# EAGLE board schematic_March15 (EAGLE 9.3.0), part 1 of 2
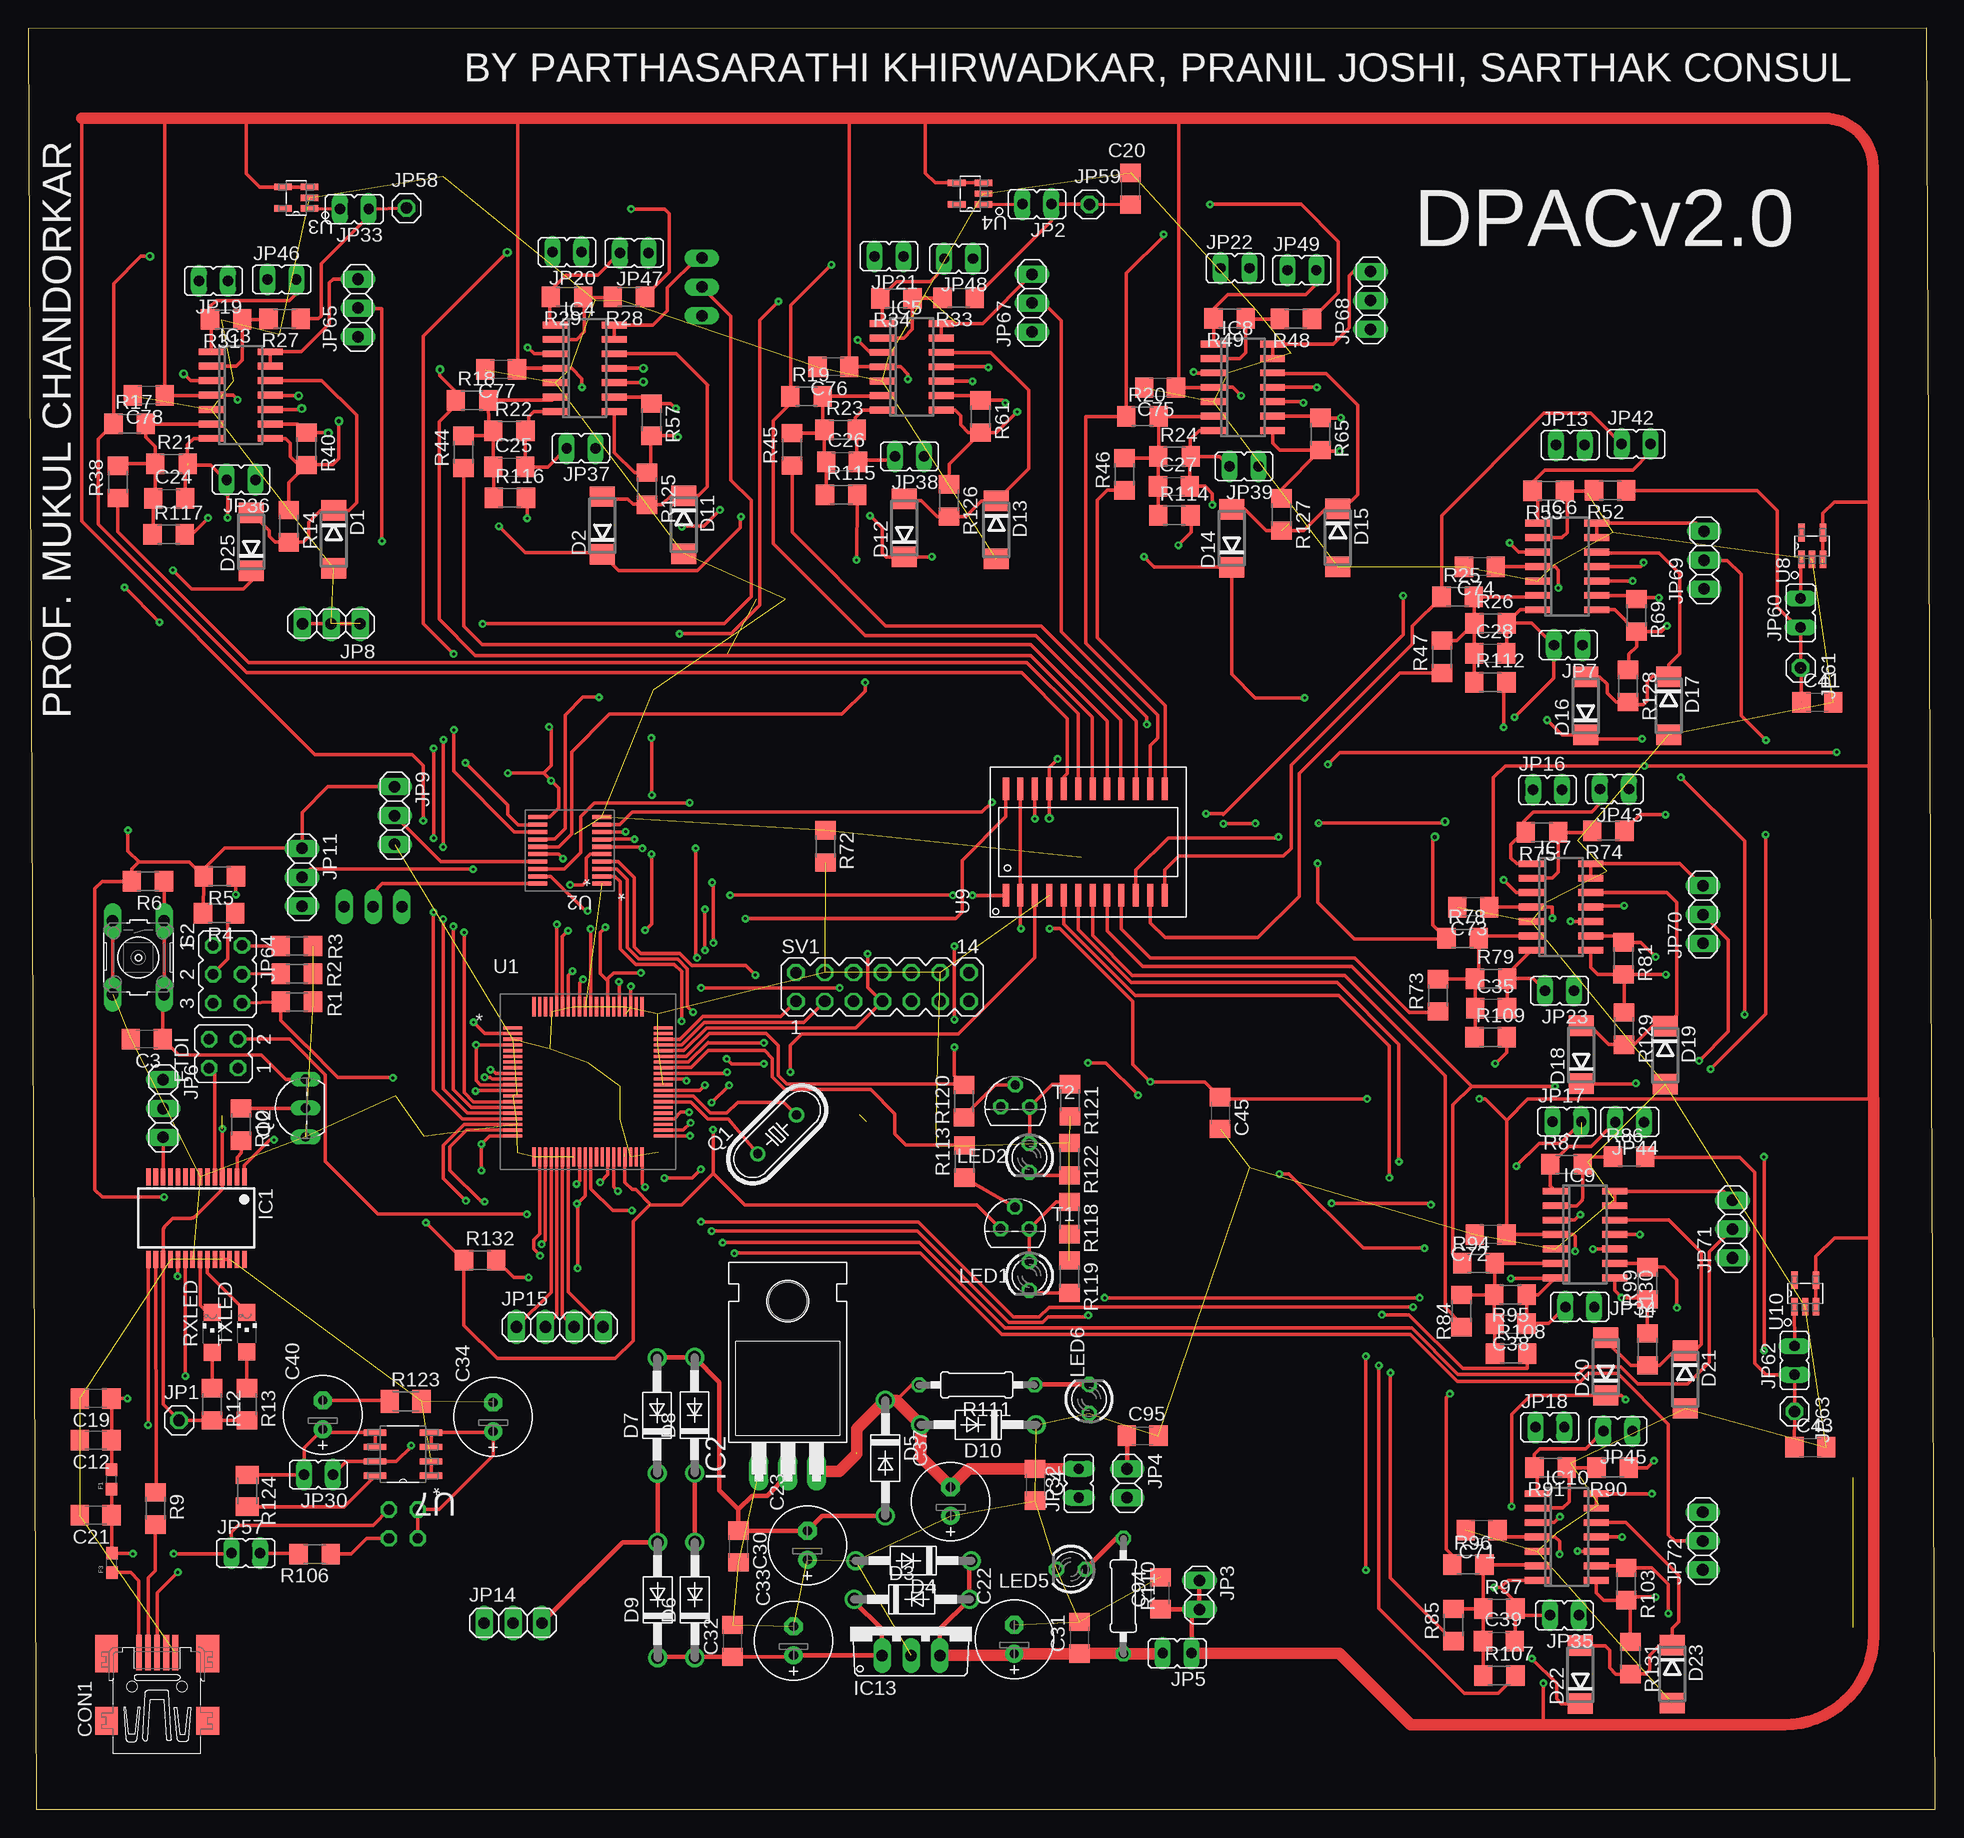
[diagram p0: board, top side]
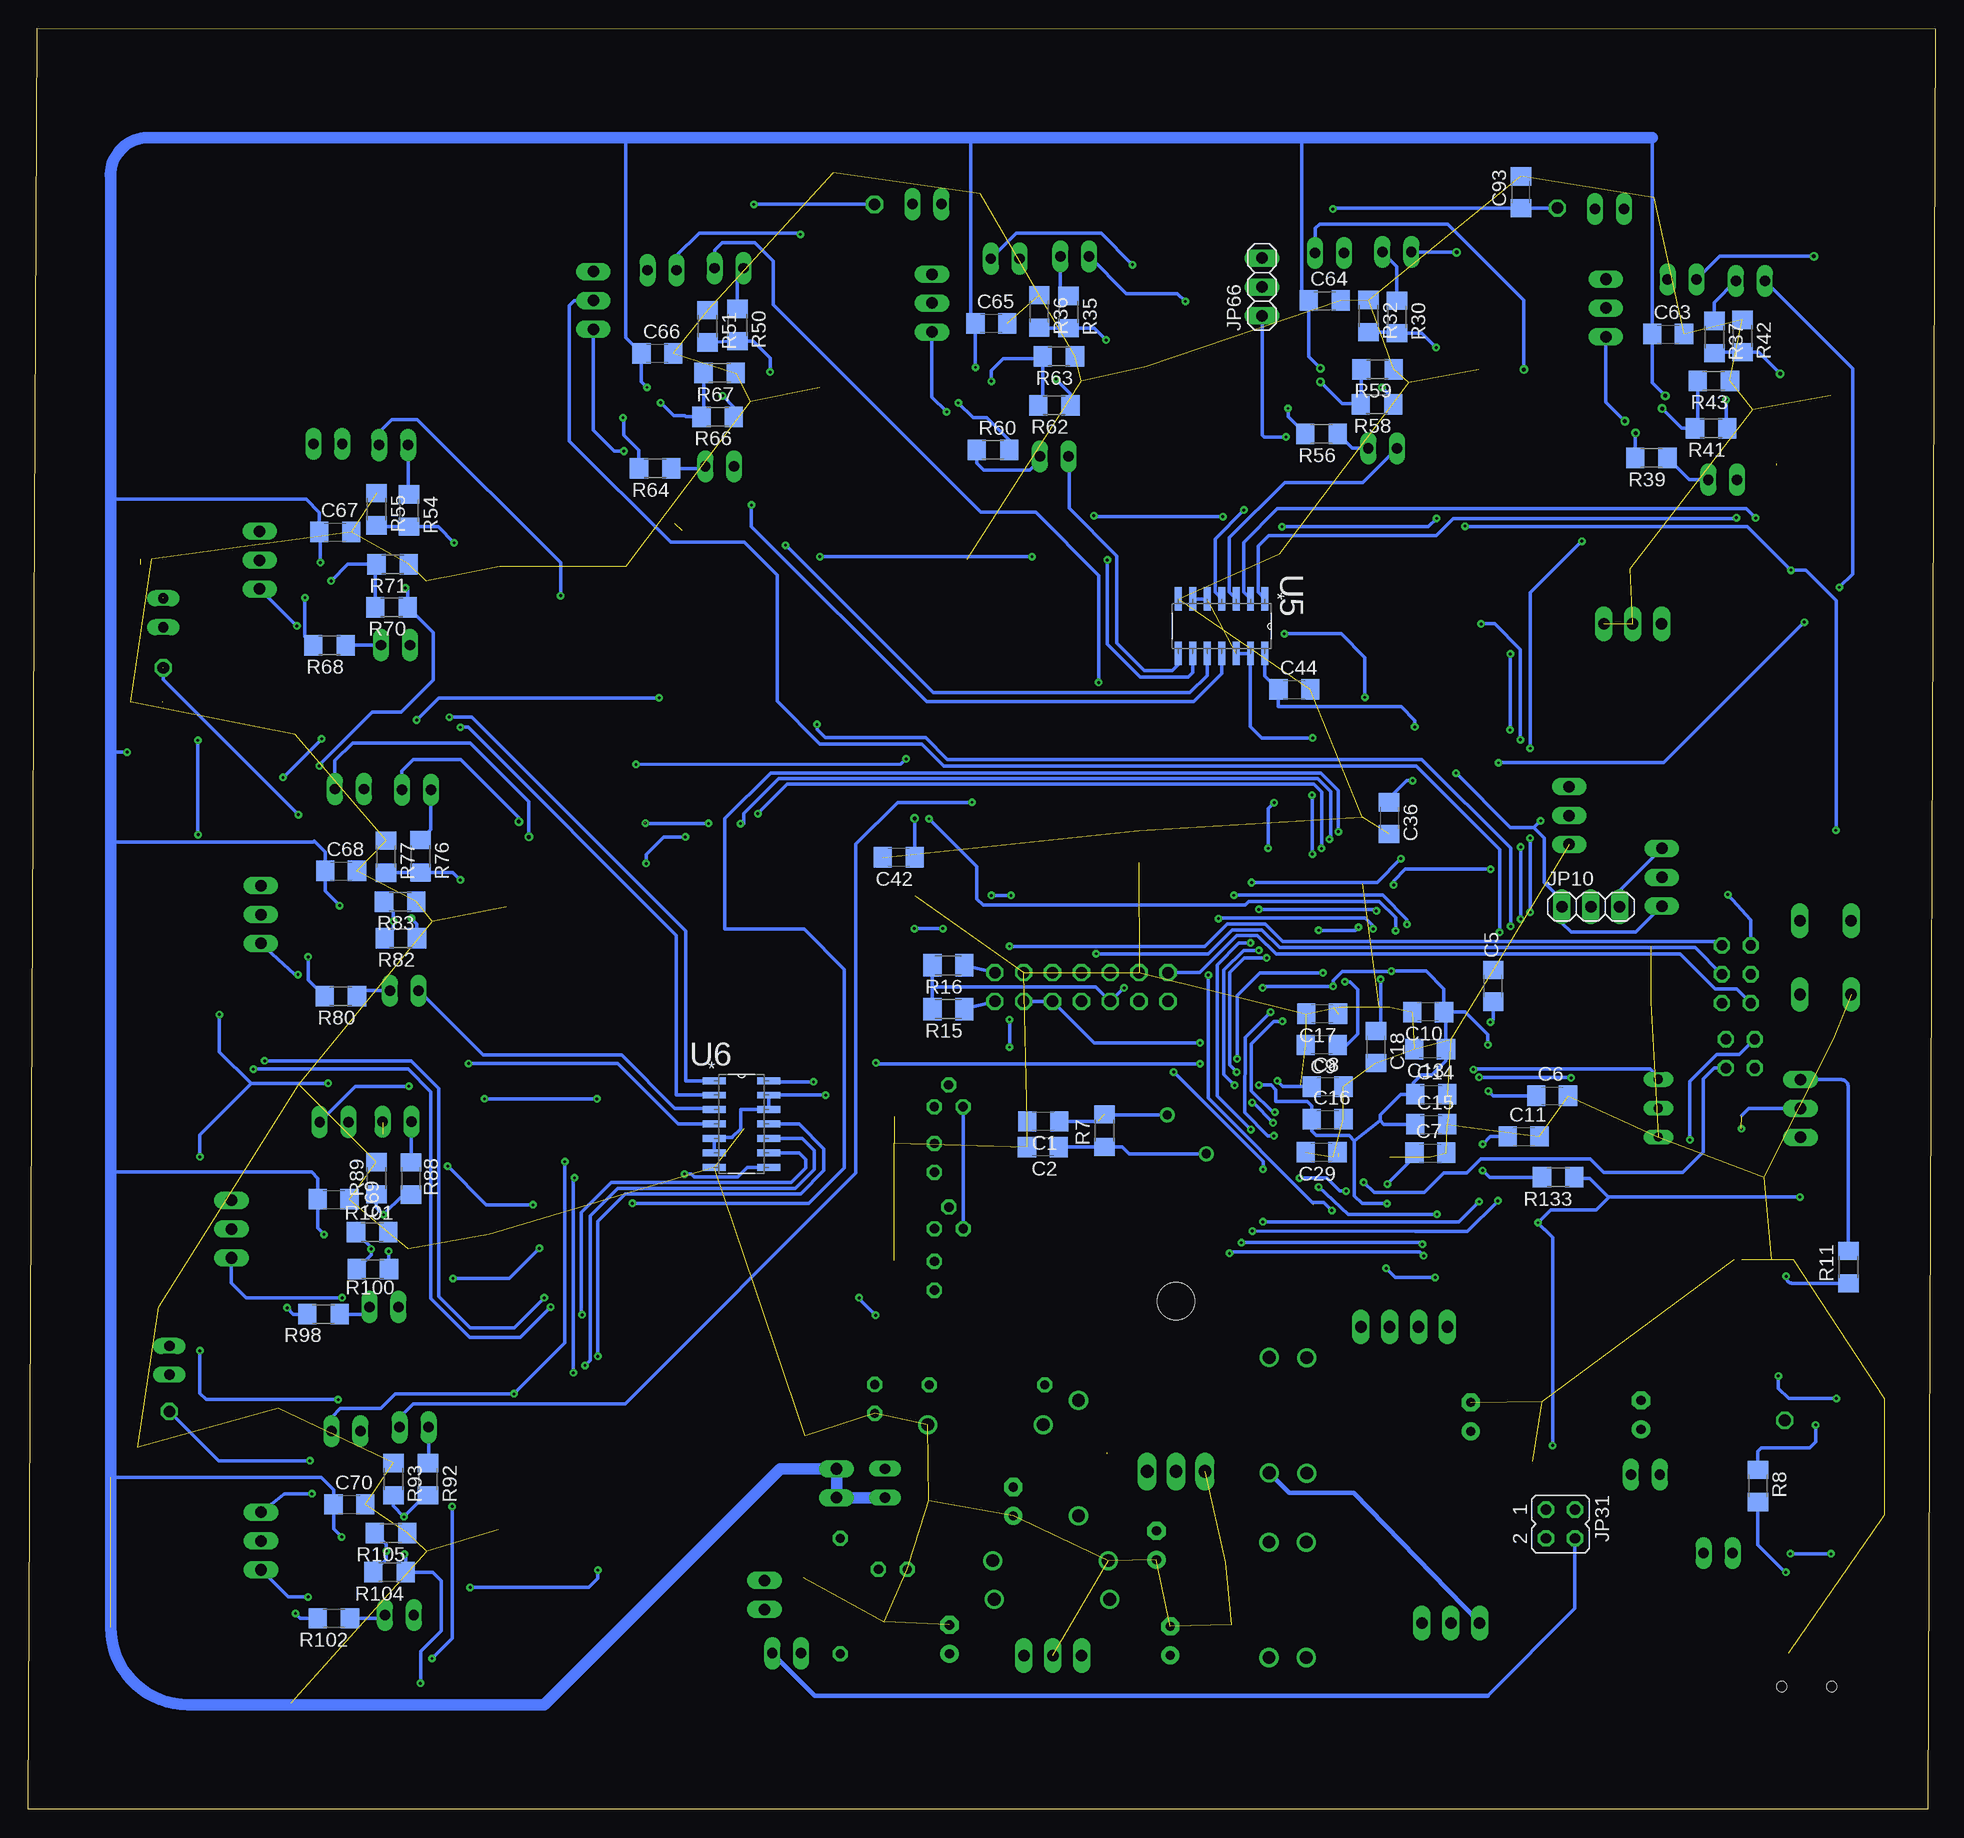
[diagram p1: board, bottom side, seen from below]

Size 167.82 x 156.77 mm. Coordinates in mm from the lower left corner, seen from the top.
Outline: 0.69,0 167.82,0.03 167.06,156.77 0,156.74 0.69,0
Copper layers (1*16): Top 0.035mm / dielectric 1.5mm / Bottom 0.035mm
Design rules "default *": minimum track width 11mil, minimum drill 10mil, track to track 7mil, track to pad 7mil, pad to pad 7mil, via to via 7mil, smd to smd 7mil, copper to edge 10mil, drill to drill 7mil, minimum pad ring 10mil, minimum via ring 8mil, stop-mask expansion 4mil, vias tented up to drill 0mil, thermal gap 10mil
Net classes: 0 default: width 0.203 mm; 1 power: width 0.254 mm

## Footprints (pad centres in the part's own frame; a part is rotated, then mirrored left to right if it is on the bottom)
C1206 = smd 1.6 x 1.8: 1 -1.4,0; 2 1.4,0
E2,5-7 = drill 0.813 pad 1.6: + -1.27,0 | drill 0.813 pad 1.6 octagon: - 1.27,0
32005-201 = smd 3.1 x 0.5: 1 3,1.6; 2 3,0.8; 3 3,0; 4 3,-0.8; 5 3,-1.6 | smd 2.5 x 2: M1 -3,-4.45; M2 -3,4.45 | smd 3.3 x 2: M3 2.9,4.45; M4 2.9,-4.45 | hole 0.9: 0,2.2; 0,-2.2
DO214AA = smd 1.8 x 2.2: A 2.55,0; C -2.55,0
DO41-10 = drill 1.118: A 5.08,0; C -5.08,0
0603 = smd 1.1 x 1: 1 -0.85,0; 2 0.85,0
JP2Q = drill 0.914 octagon: 1 -1.27,-1.27; 2 -1.27,1.27; 3 1.27,-1.27; 4 1.27,1.27
SSOP28 = smd 0.4 x 1.5: 1 -4.225,-3.625; 2 -3.575,-3.625; 3 -2.925,-3.625; 4 -2.275,-3.625; 5 -1.625,-3.625; 6 -0.975,-3.625; 7 -0.325,-3.625; 8 0.325,-3.625; 9 0.975,-3.625; 10 1.625,-3.625; 11 2.275,-3.625; 12 2.925,-3.625; 13 3.575,-3.625; 14 4.225,-3.625; 15 4.225,3.625; 16 3.575,3.625; 17 2.925,3.625; 18 2.275,3.625; 19 1.625,3.625; 20 0.975,3.625; 21 0.325,3.625; 22 -0.325,3.625; 23 -0.975,3.625; 24 -1.625,3.625; 25 -2.275,3.625; 26 -2.925,3.625; 27 -3.575,3.625; 28 -4.225,3.625
TO220H = drill 1.118 long: 1 -2.54,-10.16; 2 0,-10.16; 3 2.54,-10.16 | hole 3.302: 0,4.826
SO14 = smd 0.6 x 2.2: 1 -3.81,-2.6; 2 -2.54,-2.6; 3 -1.27,-2.6; 4 0,-2.6; 5 1.27,-2.6; 6 2.54,-2.6; 7 3.81,-2.6; 8 3.81,2.6; 9 2.54,2.6; 10 1.27,2.6; 11 0,2.6; 12 -1.27,2.6; 13 -2.54,2.6; 14 -3.81,2.6
TO220V = drill 1.016 long: 1 -2.54,-2.54; 2 0,-2.54; 3 2.54,-2.54
1X01 = drill 1.016 octagon: 1 0,0
JP1 = drill 0.914 long: 1 0,-1.27; 2 0,1.27
1X02 = drill 1.016 long: 1 -1.27,0; 2 1.27,0
1X03 = drill 1.016 long: 1 -2.54,0; 2 0,0; 3 2.54,0
1X04 = drill 1.016 long: 1 -3.81,0; 2 -1.27,0; 3 1.27,0; 4 3.81,0
JP3Q = drill 0.914 octagon: 1 -2.54,-1.27; 2 -2.54,1.27; 3 0,-1.27; 4 0,1.27; 5 2.54,-1.27; 6 2.54,1.27
LED3MM = drill 0.813 octagon: A -1.27,0; K 1.27,0
HC49/S = drill 0.813: 1 -2.413,0; 2 2.413,0
TO92-EBC = drill 0.813 long: B 0,-1.27; C -2.54,-1.27; E 2.54,-1.27
R1206 = smd 1.6 x 1.803: 1 -1.422,0; 2 1.422,0
M1206 = smd 1.6 x 2: 1 -1.4,0; 2 1.4,0
0207/10 = drill 0.813 octagon: 1 -5.08,0; 2 5.08,0
CHIPLED_1206 = smd 1.5 x 1.5: A 0,-1.75; C 0,1.75
B3F-10XX = drill 1.016 long: 1 -3.251,2.261; 2 3.251,2.261; 3 -3.251,-2.261; 4 3.251,-2.261
MA07-2 = drill 1.016 octagon: 1 -7.62,-1.27; 2 -7.62,1.27; 3 -5.08,-1.27; 4 -5.08,1.27; 5 -2.54,-1.27; 6 -2.54,1.27; 7 0,-1.27; 8 0,1.27; 9 2.54,-1.27; 10 2.54,1.27; 11 5.08,-1.27; 12 5.08,1.27; 13 7.62,-1.27; 14 7.62,1.27
TO92 = drill 0.813 octagon: 1 1.27,0; 2 0,1.905; 3 -1.27,0
PN80 = smd 1.676 x 0.279: 1 -6.617,4.75; 2 -6.617,4.25; 3 -6.617,3.75; 4 -6.617,3.25; 5 -6.617,2.75; 6 -6.617,2.25; 7 -6.617,1.75; 8 -6.617,1.25; 9 -6.617,0.75; 10 -6.617,0.25; 11 -6.617,-0.25; 12 -6.617,-0.75; 13 -6.617,-1.25; 14 -6.617,-1.75; 15 -6.617,-2.25; 16 -6.617,-2.75; 17 -6.617,-3.25; 18 -6.617,-3.75; 19 -6.617,-4.25; 20 -6.617,-4.75; 41 6.617,-4.75; 42 6.617,-4.25; 43 6.617,-3.75; 44 6.617,-3.25; 45 6.617,-2.75; 46 6.617,-2.25; 47 6.617,-1.75; 48 6.617,-1.25; 49 6.617,-0.75; 50 6.617,-0.25; 51 6.617,0.25; 52 6.617,0.75; 53 6.617,1.25; 54 6.617,1.75; 55 6.617,2.25; 56 6.617,2.75; 57 6.617,3.25; 58 6.617,3.75; 59 6.617,4.25; 60 6.617,4.75 | smd 0.279 x 1.676: 21 -4.75,-6.617; 22 -4.25,-6.617; 23 -3.75,-6.617; 24 -3.25,-6.617; 25 -2.75,-6.617; 26 -2.25,-6.617; 27 -1.75,-6.617; 28 -1.25,-6.617; 29 -0.75,-6.617; 30 -0.25,-6.617; 31 0.25,-6.617; 32 0.75,-6.617; 33 1.25,-6.617; 34 1.75,-6.617; 35 2.25,-6.617; 36 2.75,-6.617; 37 3.25,-6.617; 38 3.75,-6.617; 39 4.25,-6.617; 40 4.75,-6.617; 61 4.75,6.617; 62 4.25,6.617; 63 3.75,6.617; 64 3.25,6.617; 65 2.75,6.617; 66 2.25,6.617; 67 1.75,6.617; 68 1.25,6.617; 69 0.75,6.617; 70 0.25,6.617; 71 -0.25,6.617; 72 -0.75,6.617; 73 -1.25,6.617; 74 -1.75,6.617; 75 -2.25,6.617; 76 -2.75,6.617; 77 -3.25,6.617; 78 -3.75,6.617; 79 -4.25,6.617; 80 -4.75,6.617
PW20 = smd 1.676 x 0.356: 1 -2.819,2.925; 2 -2.819,2.275; 3 -2.819,1.625; 4 -2.819,0.975; 5 -2.819,0.325; 6 -2.819,-0.325; 7 -2.819,-0.975; 8 -2.819,-1.625; 9 -2.819,-2.275; 10 -2.819,-2.925; 11 2.819,-2.925; 12 2.819,-2.275; 13 2.819,-1.625; 14 2.819,-0.975; 15 2.819,-0.325; 16 2.819,0.325; 17 2.819,0.975; 18 2.819,1.625; 19 2.819,2.275; 20 2.819,2.925
DDC0005A_N = smd 1.575 x 0.559: 1 -1.168,0.95; 2 -1.168,0; 3 -1.168,-0.95; 4 1.168,-0.95; 5 1.168,0.95
SOIC127P600X175-14N = smd 2.057 x 0.61: 1 -4.801,7.62; 2 -4.801,6.35; 3 -4.801,5.08; 4 -4.801,3.81; 5 -4.801,2.54; 6 -4.801,1.27; 7 -4.801,0; 8 0,0; 9 0,1.27; 10 0,2.54; 11 0,3.81; 12 0,5.08; 13 0,6.35; 14 0,7.62
SOIC127P600X175-8N = smd 1.981 x 0.559: 1 -2.464,1.905; 2 -2.464,0.635; 3 -2.464,-0.635; 4 -2.464,-1.905; 5 2.464,-1.905; 6 2.464,-0.635; 7 2.464,0.635; 8 2.464,1.905
21-0042B_24 = smd 1.981 x 0.533: 1 -4.686,6.985; 2 -4.686,5.715; 3 -4.686,4.445; 4 -4.686,3.175; 5 -4.686,1.905; 6 -4.686,0.635; 7 -4.686,-0.635; 8 -4.686,-1.905; 9 -4.686,-3.175; 10 -4.686,-4.445; 11 -4.686,-5.715; 12 -4.686,-6.985; 13 4.686,-6.985; 14 4.686,-5.715; 15 4.686,-4.445; 16 4.686,-3.175; 17 4.686,-1.905; 18 4.686,-0.635; 19 4.686,0.635; 20 4.686,1.905; 21 4.686,3.175; 22 4.686,4.445; 23 4.686,5.715; 24 4.686,6.985

## Placement (x,y rotation side)
C1  36p  [C1206]  78.51,60.55 180 bottom
C2  36p  [C1206]  78.54,58.29 180 bottom
C3  0.1u  [C1206]  10.41,67.79 180 top
C4  0.1uF  [C1206]  88.6,28.58 270 top
C5  2.2u  [C1206]  38.91,72.49 90 bottom
C6  2.2u  [C1206]  33.73,62.81 0 bottom
C7  2.2u  [C1206]  44.45,57.78 0 bottom
C8  2.2u  [C1206]  53.49,63.63 0 bottom
C9  2.2u  [C1206]  54,67.28 180 bottom
C10  2.2u  [C1206]  44.65,70.18 180 bottom
C11  2.2u  [C1206]  36.25,59.23 0 bottom
C12  100nF  [C1206]  5.92,32.49 180 top
C13  2.2u  [C1206]  44.48,66.93 180 bottom
C14  2.2u  [C1206]  44.37,62.94 0 bottom
C15  2.2u  [C1206]  44.37,60.3 0 bottom
C16  2.2u  [C1206]  53.49,60.73 0 bottom
C17  2.2u  [C1206]  53.98,70.03 180 bottom
C18  2.2u  [C1206]  49.25,67.11 270 bottom
C19  4.7uF  [C1206]  5.92,36.17 180 top
C20  2.2u  [C1206]  97,142.65 90 top
C21  10nF  [C1206]  5.92,25.88 180 top
C22  10uF  [E2,5-7]  86.77,14.96 90 top
C23  1000uF  [E2,5-7]  68.55,23.24 90 top
C24  [C1206]  12.4,115.39 0 top
C25  [C1206]  42.32,118.16 0 top
C26  [C1206]  71.6,118.62 0 top
C27  [C1206]  100.81,116.46 0 top
C28  [C1206]  128.65,101.78 0 top
C29  0.1u  [C1206]  54.03,57.84 180 bottom
C30  0.1uF  [C1206]  62.48,23.14 270 top
C31  0.1uF  [C1206]  92.51,15.11 90 top
C32  0.1uF  [C1206]  61.98,14.83 90 top
C33  1000uF  [E2,5-7]  67.34,14.83 90 top
C34  0.1uF  [E2,5-7]  40.89,34.54 90 top
C35  [C1206]  128.73,70.54 0 top
C36  2.2u  [C1206]  48.08,87.25 270 bottom
C37  10uF  [E2,5-7]  81.15,27.1 90 top
C38  [C1206]  130.43,42.75 0 top
C39  [C1206]  129.41,14.81 0 top
C40  10uF  [E2,5-7]  25.91,34.72 90 top
C41  2.2u  [C1206]  157.43,97.46 0 top
C42  2.2u  [C1206]  91.24,83.79 180 bottom
C43  2.2u  [C1206]  156.82,31.88 0 top
C44  2.2u  [C1206]  56.41,98.58 0 bottom
C45  2.2u  [C1206]  104.88,61.29 270 top
C63  2.2u  [C1206]  23.52,129.87 0 bottom
C64  2.2u  [C1206]  53.75,132.82 0 bottom
C65  2.2u  [C1206]  83.08,130.81 0 bottom
C66  2.2u  [C1206]  112.47,128.17 0 bottom
C67  2.2u  [C1206]  140.82,112.45 0 bottom
C68  2.2u  [C1206]  140.31,82.6 0 bottom
C69  2.2u  [C1206]  140.97,53.7 0 bottom
C70  2.2u  [C1206]  139.57,26.85 0 bottom
C71  2.2u  [C1206]  127.89,24.59 180 top
C72  2.2u  [C1206]  128.68,50.6 180 top
C73  2.2u  [C1206]  127.15,79.43 180 top
C74  2.2u  [C1206]  127.74,109.37 180 top
C75  2.2u  [C1206]  99.59,125.15 180 top
C76  2.2u  [C1206]  70.84,126.97 180 top
C77  2.2u  [C1206]  41.61,126.75 180 top
C78  2.2u  [C1206]  10.59,124.46 180 top
C93  2.2u  [C1206]  36.47,142.34 90 bottom
C94  2.2u  [C1206]  99.62,19.02 90 top
C95  2.2u  [C1206]  98.04,32.89 0 top
CON1  UBC05V128-B0C04D  [32005-201]  11.33,10.8 90 top
D1  [DO214AA]  26.87,111.79 270 top
D2  [DO214AA]  50.52,113 90 top
D3  1N4004  [DO41-10]  77.75,18.49 0 top
D4  1N4004  [DO41-10]  77.88,21.89 180 top
D5  1N4004  [DO41-10]  75.41,30.91 270 top
D6  1N4004  [DO41-10]  58.65,18.44 90 top
D7  1N4004  [DO41-10]  55.32,34.67 90 top
D8  1N4004  [DO41-10]  58.62,34.7 90 top
D9  1N4004  [DO41-10]  55.37,18.44 90 top
D10  1N4004  [DO41-10]  83.59,33.86 180 top
D11  [DO214AA]  57.68,113.08 270 top
D12  [DO214AA]  77.09,112.8 90 top
D13  [DO214AA]  85.19,112.62 270 top
D14  [DO214AA]  105.89,111.89 90 top
D15  [DO214AA]  115.24,111.94 270 top
D16  [DO214AA]  137.03,97.13 90 top
D17  [DO214AA]  144.35,97.16 270 top
D18  [DO214AA]  136.65,66.42 90 top
D19  [DO214AA]  144.04,66.37 270 top
D20  [DO214AA]  138.81,38.99 90 top
D21  [DO214AA]  145.82,37.85 270 top
D22  [DO214AA]  136.58,11.86 90 top
D23  [DO214AA]  144.68,11.91 270 top
D25  [DO214AA]  19.61,111.58 90 top
F1  500mA  [0603]  7.32,29.06 90 top
F3  500mA  [0603]  7.34,21.69 90 top
FTDI  [JP2Q]  17.17,66.52 90 top
IC1  FT232RL  [SSOP28]  14.78,52.04 180 top
IC2  [TO220H]  66.83,39.9 0 top
IC3  TL084D  [SO14]  18.69,124.49 270 top
IC4  TL084D  [SO14]  48.97,126.85 270 top
IC5  TL084D  [SO14]  77.75,126.97 270 top
IC6  TL084D  [SO14]  135.41,109.4 270 top
IC7  TL084D  [SO14]  134.87,79.43 270 top
IC8  TL084D  [SO14]  106.88,125.17 270 top
IC9  TL084D  [SO14]  136.98,50.6 270 top
IC10  TL084D  [SO14]  135.38,23.98 270 top
IC13  7805TV  [TO220V]  77.67,16.08 0 top
JP1  [1X01]  13.26,34.24 0 top
JP2  [JP1]  88.75,141.3 90 top
JP3  [1X02]  103.05,18.87 270 top
JP4  [1X02]  96.7,28.7 270 top
JP5  [JP1]  101.09,13.74 90 top
JP6  [1X03]  11.86,61.7 270 top
JP7  [JP1]  135.51,102.49 90 top
JP8  [1X03]  26.64,104.37 180 top
JP9  [1X03]  32.23,87.48 270 top
JP10  [1X03]  30.33,79.45 0 bottom
JP11  [1X03]  24.08,82.04 270 top
JP13  [JP1]  135.69,120.09 270 top
JP14  [1X03]  42.65,16.41 0 top
JP15  [1X04]  46.76,42.47 0 top
JP16  [JP1]  133.68,89.74 270 top
JP17  [JP1]  135.38,60.53 270 top
JP18  [JP1]  133.88,33.63 270 top
JP19  [JP1]  16.28,134.54 90 top
JP20  [JP1]  47.4,137.08 90 top
JP21  [JP1]  75.74,136.7 90 top
JP22  [JP1]  106.17,135.66 270 top
JP23  [JP1]  134.75,72.06 90 top
JP30  [JP1]  25.53,29.46 90 top
JP31  [JP2Q]  32.99,25.12 270 bottom
JP32  [JP1]  92.43,28.7 0 top
JP33  [JP1]  28.68,140.87 90 top
JP34  pls  [JP1]  136.52,44.22 90 top
JP35  [JP1]  135.18,17.09 90 top
JP36  [JP1]  18.72,117.04 90 top
JP37  [JP1]  48.64,119.81 90 top
JP38  [JP1]  77.55,119.1 90 top
JP39  [JP1]  106.98,118.21 90 top
JP42  [JP1]  141.48,120.19 270 top
JP43  [JP1]  139.57,89.81 90 top
JP44  Int_inp  [JP1]  140.92,60.5 90 top
JP45  [JP1]  139.88,33.3 90 top
JP46  [JP1]  22.3,134.67 270 top
JP47  [JP1]  53.31,137.01 90 top
JP48  [JP1]  81.86,136.5 90 top
JP49  [JP1]  112.06,135.48 270 top
JP57  [JP1]  19.13,22.56 270 top
JP58  [1X01]  33.27,140.94 0 top
JP59  [1X01]  93.37,141.27 0 top
JP60  [JP1]  155.96,105.33 0 top
JP61  [1X01]  155.96,100.48 270 top
JP62  [JP1]  155.42,39.52 0 top
JP63  [1X01]  155.42,35.03 270 top
JP64  [JP3Q]  17.53,73.51 270 top
JP65  [1X03]  29.01,132.16 90 top
JP66  [1X03]  59.26,134.01 90 bottom
JP67  [1X03]  88.32,132.59 90 top
JP68  [1X03]  118.11,132.82 90 top
JP69  [1X03]  147.47,109.96 90 top
JP70  [1X03]  147.37,78.77 90 top
JP71  [1X03]  149.96,51.08 90 top
JP72  [1X03]  147.35,23.62 90 top
LED1  [LED3MM]  88.09,46.96 270 top
LED2  [LED3MM]  88.09,57.35 270 top
LED5  [LED3MM]  91.74,21.13 180 top
LED6  [LED3MM]  93.34,36.12 90 top
Q1  [HC49/S]  65.89,59.41 45 top
Q2  BC557  [TO92-EBC]  23.11,61.72 90 top
R1  2.2k  [R1206]  23.62,71.07 180 top
R2  2.2k  [R1206]  23.62,73.56 180 top
R3  2.2k  [R1206]  23.62,76 180 top
R4  820  [R1206]  16.79,78.89 180 top
R5  820  [R1206]  16.84,82.12 180 top
R6  2.2k  [R1206]  10.52,81.69 180 top
R7  1M  [R1206]  73.13,59.74 90 bottom
R8  33  [R1206]  15.62,28.47 270 bottom
R9  33  [R1206]  11.18,26.49 270 top
R10  2.2k  [R1206]  18.69,60.27 270 top
R11  10k  [R1206]  7.67,47.73 90 bottom
R12  270  [R1206]  16.15,35.66 270 top
R13  270  [R1206]  19.23,35.66 270 top
R14  [R1206]  22.91,112.95 270 top
R15  4.7k  [M1206]  86.87,70.43 180 bottom
R16  4.7k  [M1206]  86.87,74.3 180 bottom
R17  [R1206]  8.92,121.97 0 top
R18  [R1206]  39.04,124.03 0 top
R19  [R1206]  68.48,124.38 0 top
R20  [R1206]  98.04,122.61 0 top
R21  [R1206]  12.6,118.44 0 top
R22  [R1206]  42.32,121.34 0 top
R23  [R1206]  71.48,121.44 0 top
R24  [R1206]  100.86,119.08 0 top
R25  [R1206]  125.78,106.73 0 top
R26  [R1206]  128.68,104.42 0 top
R27  [R1206]  22.56,131.22 180 top
R28  [R1206]  52.83,133.15 180 top
R29  [R1206]  47.4,133.15 180 top
R30  [R1206]  47.4,131.37 270 bottom
R31  [R1206]  17.4,131.14 180 top
R32  [R1206]  49.89,131.44 270 bottom
R33  [R1206]  81.86,133.05 180 top
R34  [R1206]  76.38,133.02 180 top
R35  [R1206]  76.3,131.8 270 bottom
R36  [R1206]  78.87,131.85 270 bottom
R37  [R1206]  19.46,129.59 270 bottom
R38  [R1206]  7.87,116.84 90 top
R39  [R1206]  24.99,118.95 180 bottom
R40  [R1206]  24.49,119.76 270 top
R41  [R1206]  19.74,121.56 180 bottom
R42  [R1206]  16.99,129.69 270 bottom
R43  [R1206]  19.51,125.76 180 bottom
R44  [R1206]  38.3,119.48 90 top
R45  [R1206]  67.21,119.71 90 top
R46  [R1206]  96.47,117.53 90 top
R47  [R1206]  124.41,101.45 90 top
R48  [R1206]  111.53,131.19 180 top
R49  [R1206]  105.71,131.24 180 top
R50  [R1206]  105.44,130.66 270 bottom
R51  [R1206]  108.05,130.56 270 bottom
R52  [R1206]  139.19,116.1 180 top
R53  [R1206]  133.78,116.05 180 top
R54  [R1206]  134.32,114.33 270 bottom
R55  [R1206]  137.19,114.45 270 bottom
R56  [R1206]  54.03,121.08 180 bottom
R57  [R1206]  54.81,122.33 270 top
R58  [R1206]  49.15,123.67 180 bottom
R59  [R1206]  49.1,126.77 180 bottom
R60  [R1206]  82.93,119.68 0 bottom
R61  [R1206]  83.79,122.61 270 top
R62  [R1206]  77.55,123.6 180 bottom
R63  [R1206]  77.14,127.89 180 bottom
R64  [R1206]  112.67,118.03 180 bottom
R65  [R1206]  113.69,121.06 270 top
R66  [R1206]  107.16,122.58 180 bottom
R67  [R1206]  106.98,126.44 180 bottom
R68  [R1206]  141.33,102.46 180 bottom
R69  [R1206]  141.5,105.11 270 top
R70  [R1206]  135.86,105.82 180 bottom
R71  [R1206]  135.76,109.6 180 bottom
R72  0  [R1206]  70.13,84.76 270 top
R73  [R1206]  124.05,71.65 90 top
R74  [R1206]  139.04,86.16 180 top
R75  [R1206]  133.2,86 180 top
R76  [R1206]  133.32,83.9 270 bottom
R77  [R1206]  136.35,83.87 270 bottom
R78  [R1206]  126.21,76.66 0 top
R79  [R1206]  128.73,73.13 0 top
R80  [R1206]  140.33,71.58 180 bottom
R81  [R1206]  140.39,74.9 270 top
R82  [R1206]  135.05,76.68 180 bottom
R83  [R1206]  135.1,79.91 180 bottom
R84  [R1206]  126.11,43.87 90 top
R85  [R1206]  125.43,16.23 90 top
R86  [R1206]  140.87,57.43 180 top
R87  [R1206]  135.36,56.77 180 top
R88  [R1206]  134.14,55.52 270 bottom
R89  [R1206]  137.21,55.55 270 bottom
R90  [R1206]  139.42,30.07 180 top
R91  [R1206]  133.96,30.07 180 top
R92  [R1206]  132.64,29.06 270 bottom
R93  [R1206]  135.71,29.06 270 bottom
R94  [R1206]  127.61,48.06 0 top
R95  [R1206]  130.43,45.29 0 top
R96  [R1206]  126.72,21.54 0 top
R97  [R1206]  129.44,17.65 0 top
R98  [R1206]  141.86,43.59 180 bottom
R99  [R1206]  142.47,46.3 270 top
R100  [R1206]  137.52,47.55 180 bottom
R101  [R1206]  137.57,50.8 180 bottom
R102  [R1206]  140.94,16.81 180 bottom
R103  [R1206]  140.61,19.84 270 top
R104  [R1206]  136.04,20.88 180 bottom
R105  [R1206]  135.92,24.33 180 bottom
R106  0  [R1206]  25.2,22.48 180 top
R107  [R1206]  129.44,11.79 0 top
R108  [R1206]  130.48,40.13 0 top
R109  [R1206]  128.68,67.97 0 top
R110  1K  [0207/10]  96.37,18.77 270 top
R111  1K  [0207/10]  83.46,37.36 180 top
R112  [R1206]  128.65,99.21 0 top
R113  470  [R1206]  82.37,57.02 90 top
R114  [R1206]  100.84,113.89 0 top
R115  [R1206]  71.53,115.72 0 top
R116  [R1206]  42.37,115.44 0 top
R117  [R1206]  12.34,112.22 0 top
R118  10k  [R1206]  91.62,52.04 270 top
R119  470  [R1206]  91.62,46.89 270 top
R120  470  [R1206]  82.32,62.33 90 top
R121  10k  [R1206]  91.64,62.41 270 top
R122  470  [R1206]  91.62,57.23 270 top
R123  1  [M1206]  33.2,35.92 0 top
R124  1  [M1206]  19.25,28.04 270 top
R125  [R1206]  54.43,116.26 270 top
R126  [R1206]  81,115.21 270 top
R127  [R1206]  110.29,113.97 270 top
R128  [R1206]  140.77,98.88 270 top
R129  [R1206]  140.44,68.73 270 top
R130  [R1206]  142.47,40.49 270 top
R131  [R1206]  140.97,13.33 270 top
R132  0  [R1206]  39.75,48.34 0 top
R133  0  [R1206]  33.2,55.63 180 bottom
RXLED  [CHIPLED_1206]  16.18,41.99 0 top
S2  [B3F-10XX]  9.68,74.98 270 top
SV1  JTAG  [MA07-2]  75.16,72.39 0 top
T1  BC547  [TO92]  86.82,51.1 0 top
T2  BC547  [TO92]  86.84,61.85 0 top
TXLED  [CHIPLED_1206]  19.23,42.01 0 top
U1  TMS320F28069_PN_80  [PN80]  49.25,64.03 0 top
U2  TLV5610_PW_20  [PW20]  47.62,84.4 180 top
U3  REF2030AIDDCR  [DDC0005A_N]  23.57,141.86 180 top
U4  REF2030AIDDCR  [DDC0005A_N]  82.88,142.21 180 top
U5  TS12A44514DR  [SOIC127P600X175-14N]  66.62,101.75 270 bottom
U6  TS12A44514DR  [SOIC127P600X175-14N]  102.67,56.52 0 bottom
U7  TPS7333QD  [SOIC127P600X175-8N]  32.97,31.27 180 top
U8  REF2030AIDDCR  [DDC0005A_N]  156.97,111.2 90 top
U9  MAX395CWG+  [21-0042B_24]  93.01,85.14 90 top
U10  REF2030AIDDCR  [DDC0005A_N]  156.36,45.42 90 top

## Library data of the parts
C1-C3 C5-C23 C29 C33 C34 C36 C37 C40-C45 C63-C78 C93-C95 R1-R13 R106 R110 R111 R113 R118-R122 R132 R133 = resistor
C4 C24-C28 C30-C32 C35 C38 C39 = rcl; SPICEPREFIX: C
CON1 = con-cypressindustries; OC_FARNELL: unknown; OC_NEWARK: unknown
D1-D23 D25 = diode
F1 F3 = SparkFun
FTDI JP2 JP5 JP7 JP13 JP16-JP23 JP30-JP39 JP42-JP49 JP57 JP60 JP62 JP64 = jumper
IC1 = ftdichip; MPN: FT232RL; OC_FARNELL: 1146032; OC_NEWARK: 91K9918
IC2-IC10 IC13 = linear
JP1 JP3 JP4 JP6 JP8-JP11 JP14 JP15 JP58 JP59 JP61 JP63 JP65-JP72 = pinhead
LED1 LED2 LED5 LED6 RXLED TXLED = led
Q1 = crystal; OC_FARNELL: 1667008; OC_NEWARK: unknown
Q2 = transistor-pnp
R14-R105 R107-R109 R112 R114-R117 R123-R131 = rcl; SPICEPREFIX: R
S2 = switch-omron; MPN: B3F-1000; OC_FARNELL: 176432; OC_NEWARK: 36M3542
SV1 = con-lstb; OC_FARNELL: unknown; OC_NEWARK: unknown
T1 T2 = transistor-neu-to92
U1 = uP; MANUFACTURER_PART_NUMBER: tms320f28069_pn_80; VENDOR: Texas Instruments
U2 = TLV5610; MANUFACTURER_PART_NUMBER: tlv5610_pw_20; VENDOR: Texas Instruments
U3 U4 U8 U10 = ref2030
U5 U6 = Texas Instruments_By_element14_Batch_1; MPN: TS12A44514DR; OC_FARNELL: 1755398; OC_NEWARK: 95M0176; PACKAGE: SOIC-14; SUPPLIER: Texas Instruments
U7 = Texas Instruments_By_element14_Batch_1; MPN: TPS7333QD; OC_FARNELL: -; OC_NEWARK: 52F2803; PACKAGE: SOIC-8; SUPPLIER: Texas Instruments
U9 = MAX395; MANUFACTURER_PART_NUMBER: MAX395CWG+; VENDOR: Maxim Integrated Products

## Nets
3V3_OUT: IC1.4 IC1.17 JP1.1 JP6.2 R12.2 R13.2
+1.5V1: C93.1 JP33.1 JP58.1 R27.1 R28.1
+1.5V2: C20.1 JP2.1 JP59.1 R33.1 R48.1
+1.5V3: C41.1 JP60.1 JP61.1 R52.1 R74.1
+1.5V4: C43.1 JP62.1 JP63.1 R86.1 R90.1
+3V3: C29.1 D2.C D12.C D14.C D16.C D18.C D20.C D22.C D25.C JP9.1 JP10.3 JP11.1 JP30.1 R4.2 R5.2 R6.2 R132.1 R133.1 T1.3 T2.3 U1.37 U2.16 U7.7
+5V: C36.1 C44.1 C45.1 C71.1 C72.1 C73.1 C74.1 C75.1 C76.1 C77.1 C78.1 C94.1 IC3.4 IC4.4 IC5.4 IC6.4 IC7.4 IC8.4 IC9.4 IC10.4 JP3.1 JP3.2 JP5.1 JP10.1 JP11.3 JP31.4 R41.1 R58.1 R62.1 R66.1 R70.1 R82.1 R100.1 R104.1 R106.1 U2.11 U3.3 U3.4 U4.3 U4.4 U5.14 U6.14 U8.3 U8.4 U9.2 U9.23 U10.3 U10.4
-5V: C42.1 C63.1 C64.1 C65.1 C66.1 C67.1 C68.1 C69.1 C70.1 C95.1 IC3.11 IC4.11 IC5.11 IC6.11 IC7.11 IC8.11 IC9.11 IC10.11 JP4.1 JP4.2 JP32.1 U9.21
?????: JP9.2 U2.17
ADCINA0: JP69.2 U1.19
ADCINA1: JP70.2 U1.18
ADCINA2: JP65.2 U1.17
ADCINA4: JP66.2 U1.16
ADCINA5: JP67.2 U1.15
ADCINA6: JP68.2 U1.14
ADCINB0: JP72.2 U1.22
ADCINB1: JP71.2 U1.23
ADCINB2: JP15.1 U1.24
ADCINB4: JP15.2 U1.25
ADCINB5: JP15.3 U1.26
ADCINB6: JP15.4 U1.27
AGND: C4.2 C20.2 C22.- C23.+ C30.2 C31.2 C32.2 C33.- C36.2 C37.+ C41.2 C42.2 C43.2 C44.2 C45.2 C63.2 C64.2 C65.2 C66.2 C67.2 C68.2 C69.2 C70.2 C71.2 C72.2 C73.2 C74.2 C75.2 C76.2 C77.2 C78.2 C93.2 C94.2 C95.2 D1.A D4.A D10.C D11.A D13.A D15.A D17.A D19.A D21.A D23.A IC2.1 IC3.5 IC4.5 IC5.5 IC6.5 IC7.5 IC8.5 IC9.5 IC10.5 IC13.2 JP8.1 JP8.2 JP8.3 LED5.K LED6.A R32.1 R36.1 R42.1 R43.1 R51.1 R55.1 R59.1 R63.1 R67.1 R71.1 R72.1 R77.1 R83.1 R89.1 R93.1 R101.1 R105.1 U2.10 U3.2 U4.2 U5.7 U6.7 U8.2 U10.2
BUFIN1: D1.C D25.A IC3.12 R14.2
BUFIN2: D2.A D11.C IC4.12 R125.2
BUFIN3: D12.A D13.C IC5.12 R126.2
BUFIN4: D14.A D15.C IC8.12 R127.2
BUFIN5: D16.A D17.C IC6.12 R128.2
BUFIN6: D18.A D19.C IC7.12 R129.2
BUFIN7: D20.A D21.C IC9.12 R130.2
BUFIN8: D22.A D23.C IC10.12 R131.2
CBUS4: IC1.12 JP6.3
D+: IC1.15 R8.1
D-: IC1.16 R9.1
DACDIN: U1.44 U2.2
DACDOUT: U1.42 U2.19
DACO1: JP19.2 U2.12
DACO2: JP20.2 U2.13
DACO3: JP21.2 U2.14
DACO4: JP22.2 U2.15
DACO5: JP13.2 U2.6
DACO6: JP16.2 U2.7
DACO7: JP17.2 U2.8
DACO8: JP18.2 U2.9
DTR_RESET: Q2.B R10.1
DVDD: JP10.2 U2.20
FS: U1.31 U2.4
GND: C1.2 C2.2 C3.2 C5.2 C6.2 C7.2 C8.2 C9.2 C10.2 C11.2 C12.2 C13.2 C14.2 C15.2 C16.2 C17.2 C18.2 C19.2 C21.2 C29.2 C34.- CON1.5 IC1.7 IC1.18 IC1.21 IC1.25 IC1.26 JP9.3 Q2.C R1.1 R2.1 R3.1 R72.2 R118.2 R119.1 R121.2 R122.1 R123.2 S2.3 S2.4 SV1.4 SV1.8 SV1.10 SV1.12 U1.3 U1.13 U1.21 U1.28 U1.38 U1.50 U1.64 U1.71 U1.73 U2.1 U7.1 U7.2 U9.4
GPIO34: JP64.2 R3.2 R120.2 U1.55
IDK: C22.+ C31.1 D3.A D4.C IC13.3 JP5.2 R110.2
IDK2: C4.1 C37.- D5.C D10.A IC2.3 JP32.2 R111.2
IN1: JP19.1 R37.1
IN2: JP20.1 R30.1
IN3: JP21.1 R35.1
IN4: JP22.1 R50.1
IN5: JP13.1 R54.1
IN6: JP16.1 R76.1
IN7: JP17.1 R88.1
IN8: JP18.1 R92.1
INT_CONTROL: U1.67 U5.5 U5.6 U5.12 U5.13 U6.5 U6.6 U6.12 U6.13
INTINP1: JP46.1 R17.1 U9.20
INTINP2: JP47.1 R18.1 U9.18
INTINP3: JP48.1 R19.1 U9.16
INTINP4: JP49.1 R20.1 U9.14
INTINP5: JP42.1 R25.1 U9.12
INTINP6: JP43.1 R78.1 U9.10
INTINP7: JP44.1 R94.1 U9.8
INTINP8: JP45.1 R96.1 U9.6
INTSWITCH1: R117.2 U5.2
INTSWITCH2: R116.2 U5.4
INTSWITCH3: R115.2 U5.9
INTSWITCH4: R114.2 U5.10
INTSWITCH5: R112.2 U6.2
INTSWITCH6: R109.2 U6.4
INTSWITCH7: R108.2 U6.9
INTSWITCH8: R107.2 U6.10
JTAG_TRST: JP64.5 SV1.2
LDACBAR: U1.52 U2.18
LED1: R113.2 U1.53
LIMO1: IC3.13 IC3.14 JP65.3
LIMO2: IC4.13 IC4.14 JP66.3
LIMO3: IC5.13 IC5.14 JP67.3
LIMO4: IC8.13 IC8.14 JP68.3
LIMO5: IC6.13 IC6.14 JP69.3
LIMO6: IC7.13 IC7.14 JP70.3
LIMO7: IC9.13 IC9.14 JP71.3
LIMO8: IC10.13 IC10.14 JP72.3
N$1: C5.1 U1.2
N$2: C6.1 U1.12
N$3: C7.1 U1.29
N$4: C8.1 U1.51
N$5: C9.1 U1.65
N$6: IC1.2 R10.2
N$7: C11.1 R133.2 U1.20
N$8: C18.1 U1.72
N$9: JP64.1 R5.1
N$10: JP64.3 R4.1
N$11: CON1.2 R9.2
N$12: CON1.3 R8.2
N$13: IC1.19 R11.1
N$14: IC1.22 RXLED.C
N$15: IC1.23 TXLED.C
N$16: R12.1 RXLED.A
N$17: R13.1 TXLED.A
N$20: C25.1 IC4.6 R18.2 R22.1 R44.2 R116.1
N$21: C26.1 IC5.6 R19.2 R23.1 R45.2 R115.1
N$22: C27.1 IC8.6 R20.2 R24.1 R46.2 R114.1
N$23: IC4.2 R28.2 R29.1
N$24: R15.1 SV1.13
N$25: R16.1 SV1.14
N$26: IC4.3 R30.2 R32.2
N$28: C24.1 IC3.6 R17.2 R21.1 R38.2 R117.1
N$29: IC3.2 R27.2 R31.1
N$30: C28.1 IC6.6 R25.2 R26.1 R47.2 R112.1
N$31: IC5.2 R33.2 R34.1
N$33: IC3.3 R37.2 R42.2
N$35: IC5.3 R35.2 R36.2
N$36: IC3.9 R39.2 R40.1
N$38: IC3.10 R41.2 R43.2
N$39: IC8.2 R48.2 R49.1
N$40: IC8.3 R50.2 R51.2
N$41: IC7.2 R74.2 R75.1
N$42: IC6.2 R52.2 R53.1
N$44: IC6.3 R54.2 R55.2
N$45: IC7.3 R76.2 R77.2
N$47: IC4.9 R56.2 R57.1
N$48: IC4.10 R58.2 R59.2
N$49: IC5.9 R60.2 R61.1
N$50: IC5.10 R62.2 R63.2
N$51: IC8.9 R64.2 R65.1
N$52: IC8.10 R66.2 R67.2
N$53: IC6.9 R68.2 R69.1
N$54: IC6.10 R70.2 R71.2
N$55: C35.1 IC7.6 R73.2 R78.2 R79.1 R109.1
N$56: IC7.9 R80.2 R81.1
N$57: IC7.10 R82.2 R83.2
N$58: IC9.2 R86.2 R87.1
N$59: IC9.3 R88.2 R89.2
N$60: IC10.2 R90.2 R91.1
N$61: IC10.3 R92.2 R93.2
N$62: C38.1 IC9.6 R84.2 R94.2 R95.1 R108.1
N$63: C39.1 IC10.6 R85.2 R96.2 R97.1 R107.1
N$64: IC9.9 R98.2 R99.1
N$65: IC9.10 R100.2 R101.2
N$66: IC10.9 R102.2 R103.1
N$67: IC10.10 R104.2 R105.2
N$73: C32.1 C33.+ D3.C D6.C D9.C IC13.1
N$77: C40.+ JP30.2 R124.1 U7.5 U7.6
N$78: C40.- R123.1
N$80: LED6.K R111.1
N$81: C34.+ JP31.1 JP31.3 U7.3 U7.4
N$82: LED5.A R110.1
N$83: CON1.1 F3.1
N$86: C23.- C30.1 D5.A D7.A D8.A IC2.2
N$91: JP33.2 U3.1
N$95: JP6.1 R11.2
N$102: R113.1 T1.2
N$104: LED1.A R118.1 T1.1
N$105: LED1.K R119.2
N$106: R120.1 T2.2
N$107: LED2.A R121.1 T2.1
N$108: LED2.K R122.2
N$132: JP2.2 U4.1
N$134: JP57.2 R106.2
N$135: JP60.2 U8.1
N$136: JP62.2 U10.1
OUT1: IC3.8 JP65.1 R14.1 R40.2
OUT2: IC4.8 JP66.1 R57.2 R125.1
OUT3: IC5.8 JP67.1 R61.2 R126.1
OUT4: IC8.8 JP68.1 R65.2 R127.1
OUT5: IC6.8 JP69.1 R69.2 R128.1
OUT6: IC7.8 JP70.1 R81.2 R129.1
OUT7: IC9.8 JP71.1 R99.2 R130.1
OUT8: IC10.8 JP72.1 R103.2 R131.1
PLS1: JP36.1 R39.1
PLS2: JP37.1 R56.1
PLS3: JP38.1 R60.1
PLS4: JP39.1 R64.1
PLS5: JP7.1 R68.1
PLS6: JP23.1 R80.1
PLS7: JP34.1 R98.1
PLS8: JP35.1 R102.1
PREBAR: JP11.2 U2.5
RES: R124.2 U7.8
RESET#: C3.1 Q2.E R6.1 S2.1 S2.2 U1.9
RXD: FTDI.2 IC1.5
SPIBCLK: U1.76 U9.1
SPIBMISO: U1.75 U9.22
SPIBMOSI: U1.35 U9.3
SPIBSS: U1.70 U9.24
SPICLK: U1.41 U2.3
SV1-1: D7.C D9.A JP14.3
SV1-2: JP14.2
SV1-3: D6.A D8.C JP14.1
SWITCH1: R38.1 U9.19
SWITCH2: R44.1 U9.17
SWITCH3: R45.1 U9.15
SWITCH4: R46.1 U9.13
SWITCH5: R47.1 U9.11
SWITCH6: R73.1 U9.9
SWITCH7: R84.1 U9.7
SWITCH8: R85.1 U9.5
TCK: SV1.9 SV1.11 U1.54
TDI: SV1.3 U1.57
TDO: JP64.4 R2.2 SV1.7 U1.56
TMS: SV1.1 U1.58
TMS_RXD: FTDI.3 U1.40
TMS_TXD: FTDI.1 U1.34
TRST: JP64.6 R1.2 U1.10
TXD: FTDI.4 IC1.1
USB_VCC: C21.1 F1.1 F3.2 JP31.2 JP57.1
VCC [power]: C12.1 C19.1 F1.2 IC1.20
VDDIO: C10.1 C13.1 C14.1 C15.1 C16.1 C17.1 R15.2 R16.2 R132.2 SV1.5 U1.4 U1.11 U1.30 U1.49 U1.63 U1.74
X1: C24.2 IC3.7 JP36.2 R21.2 U5.1
X1CLK: C1.1 Q1.2 R7.2 U1.48
X1DOT: IC3.1 JP46.2 R31.2
X2: C25.2 IC4.7 JP37.2 R22.2 U5.3
X2CLK: C2.1 Q1.1 R7.1 U1.47
X2DOT: IC4.1 JP47.2 R29.2
X3: C26.2 IC5.7 JP38.2 R23.2 U5.8
X3DOT: IC5.1 JP48.2 R34.2
X4: C27.2 IC8.7 JP39.2 R24.2 U5.11
X4DOT: IC8.1 JP49.2 R49.2
X5: C28.2 IC6.7 JP7.2 R26.2 U6.1
X5DOT: IC6.1 JP42.2 R53.2
X6: C35.2 IC7.7 JP23.2 R79.2 U6.3
X6DOT: IC7.1 JP43.2 R75.2
X7: C38.2 IC9.7 JP34.2 R95.2 U6.8
X7DOT: IC9.1 JP44.2 R87.2
X8: C39.2 IC10.7 JP35.2 R97.2 U6.11
X8DOT: IC10.1 JP45.2 R91.2